# Altium PCB AudioSpectrum.PcbDoc
Units mil, origin at the board's own origin, x right, y up, seen from the top; angles counter-clockwise.
Board outline 2755.24 x 1895 mil, 2 copper layers (Top Layer, Bottom Layer); 57 components, 57 nets, 223 pads, 35 vias.
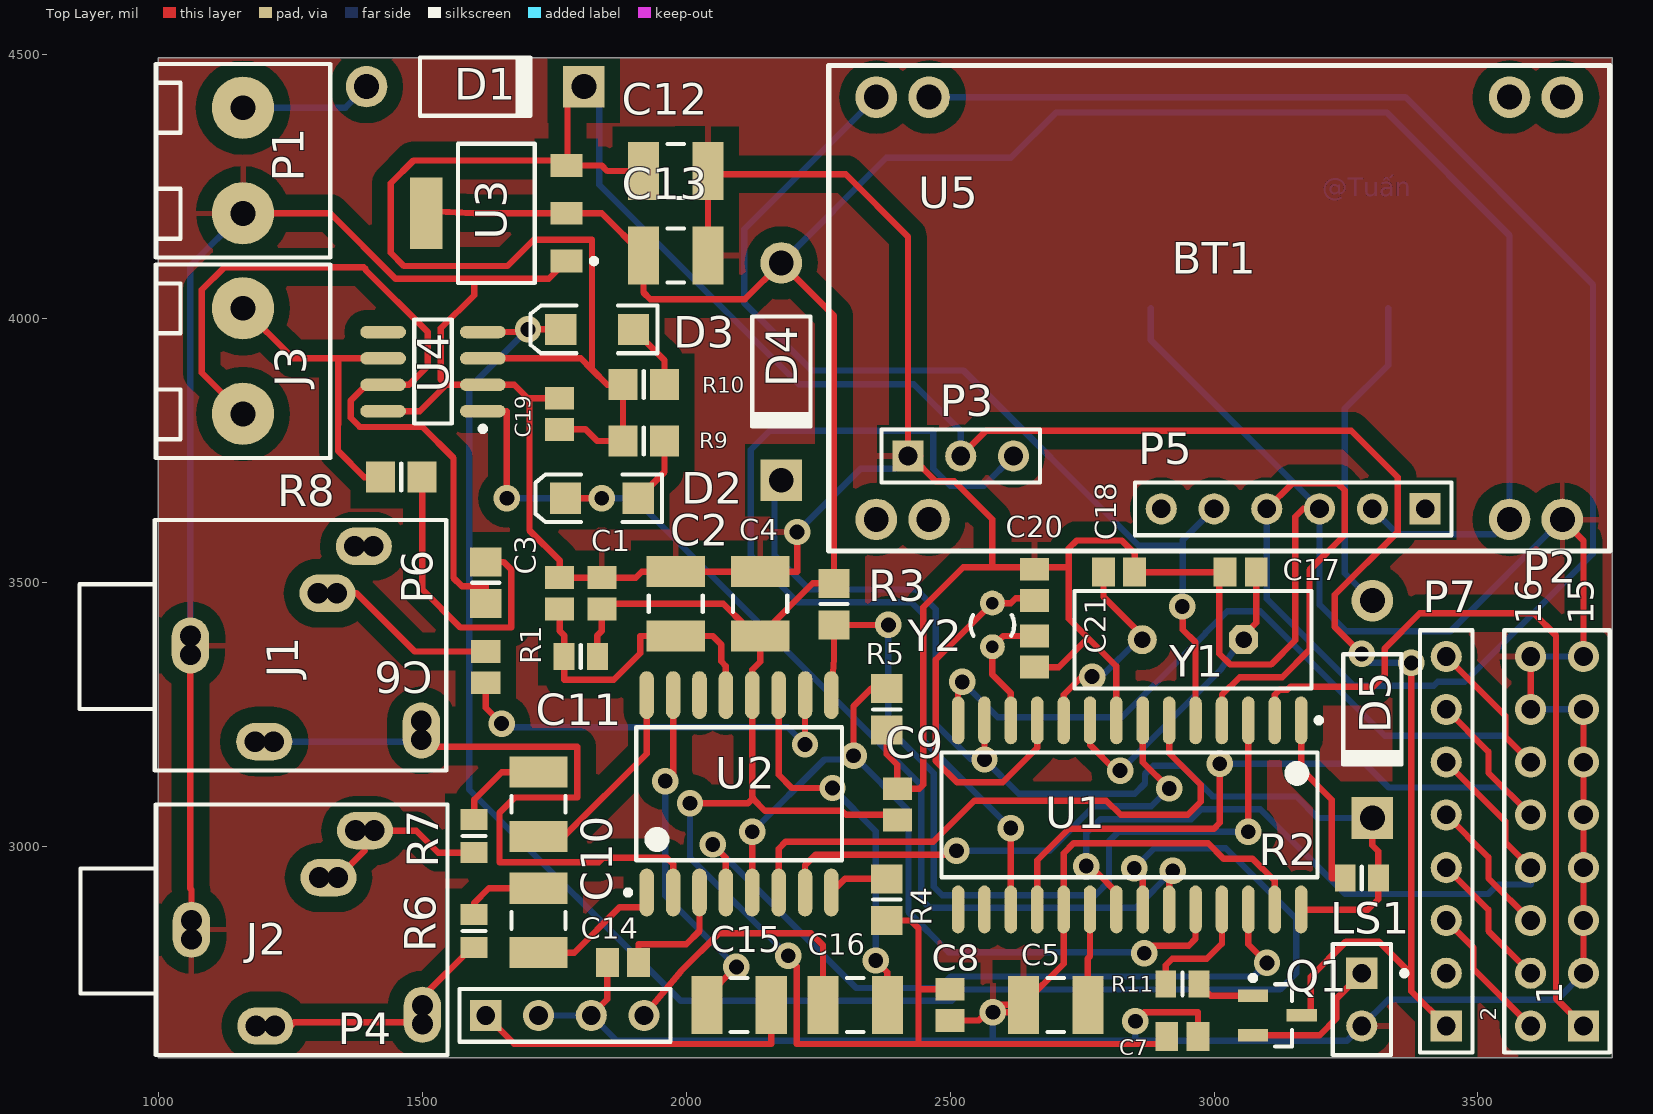
[diagram p0: Top Layer view]
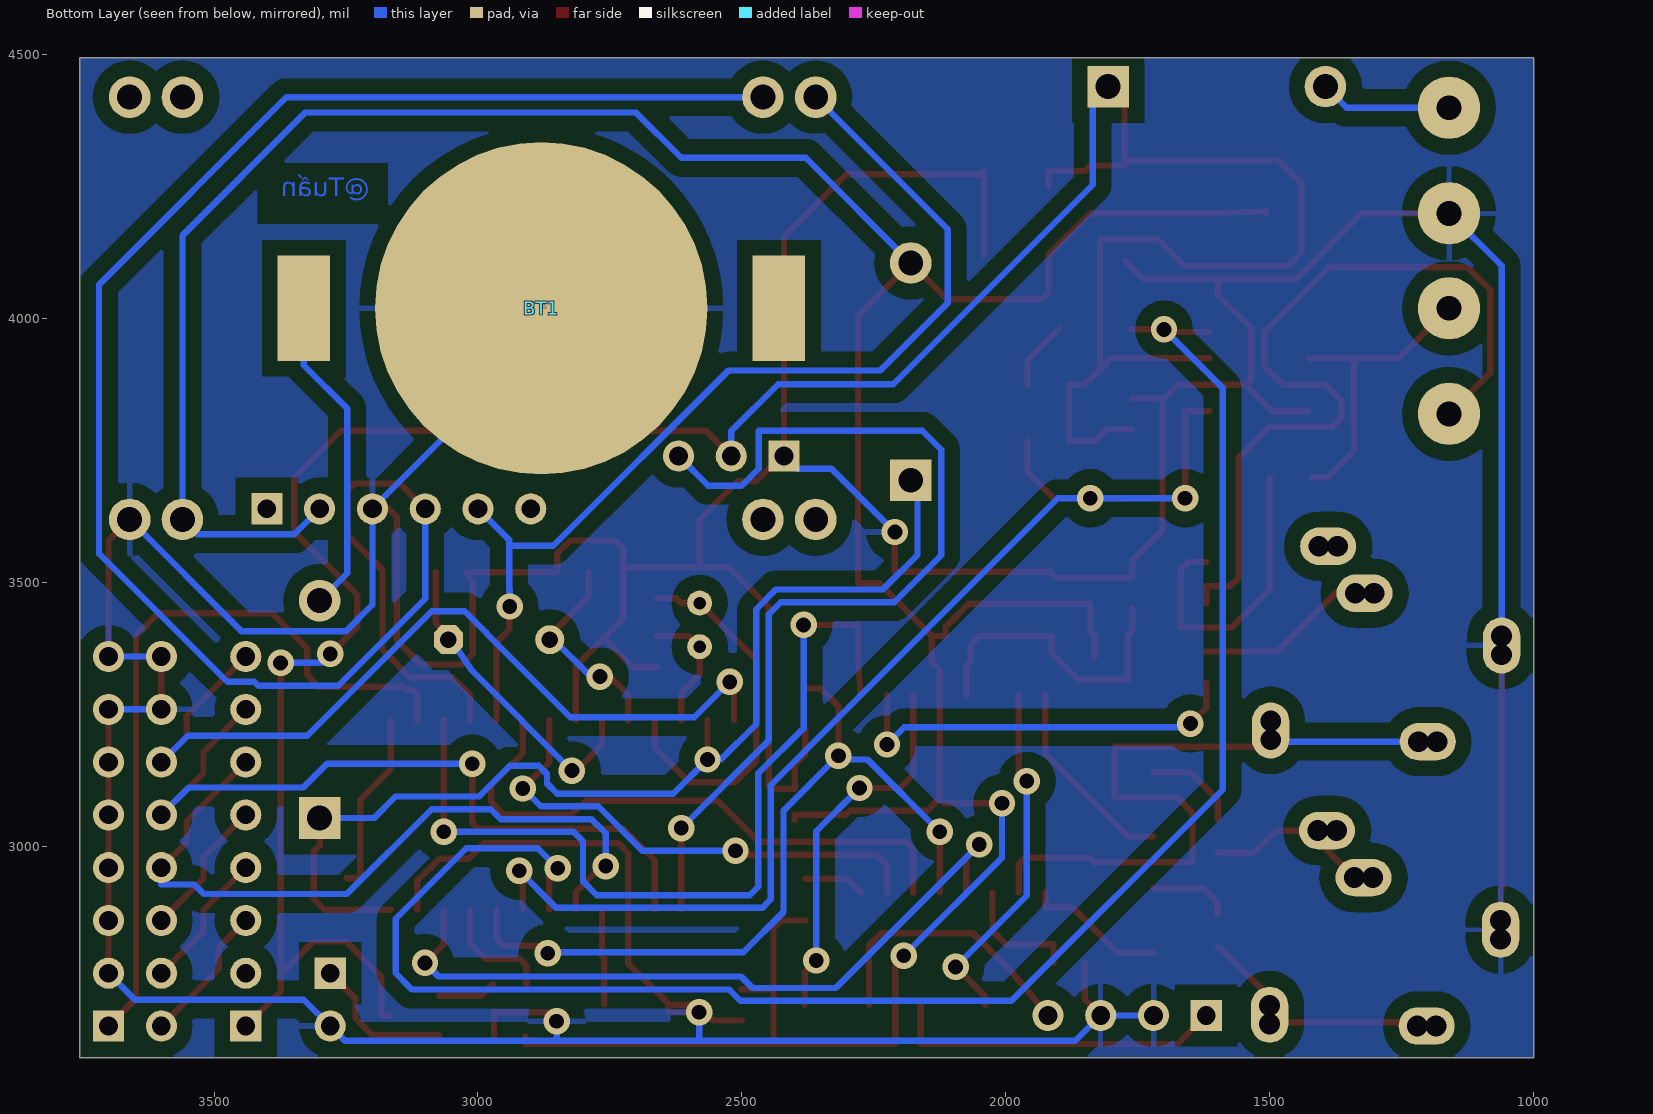
[diagram p1: Bottom Layer view, seen from below]

## Layer stack, top to bottom
Top Layer: signal copper 1.4
Dielectric: core 12.6, FR-4, Dk 4.8
Bottom Layer: signal copper 1.4

## Board outline
999.76,2600 999.76,4494.76 2160,4494.86 3755,4495 3755,2600

## Design rules (kind name [scope] priority, off if disabled: settings)
Clearance Clearance_6 [InNamedPolygon('BotPour')] p1: gap=30
Clearance Clearance_5 [InNamedPolygon('Top Overlay-No Net')] p2: gap=30
Clearance Clearance_4 [OnLayer('Top Overlay')] p3: gap=7
Clearance Clearance_3 [OnLayer('Top Solder') vs (InPadClass('All Pads'))] p4: gap=7
Clearance Clearance_2 [OnLayer('Top Paste')] p5: gap=7
Clearance Clearance_1 [OnLayer('Top Solder')] p6: gap=7
Clearance [All] p7: gap=12
PolygonConnect [All] p1: connectstyle=Relief reliefconductorwidth=10 reliefentries=4 polygonreliefangle="90 Angle"
RoutingVias [All] p1: holewidth=28 width=50 viastyle="Through Hole" minholewidth=28 minwidth=50 maxholewidth=28 maxwidth=50
SilkscreenOverComponentPads [All] p1: minsilkscreentomaskgap=10
SolderMaskExpansion [All] p1: expansion=4
Width [All] p1: maxlimit=50 minlimit=10 preferedwidth=12
27 further rules are at their usual default settings.

## Components (designator, comment, footprint, x,y, rotation, side; value= is the part's Value field where it differs from the comment)
BT1 "Battery" CR2032 2880,4020 r180 bottom
C1 "Cap Pol3" CAPC2012L 1840,3480 r90 top
C2 "Cap Pol3" CAPC3225M 1980,3460 r90 top
C3 "Cap Pol3" CAPC2012L 1760,3480 r90 top
C4 "Cap Pol3" CAPC3225M 2140,3460 r90 top
C5 "Cap Pol3" CAPC3225M 2700,2700 r180 top
C6 "Cap Pol3" CAPC2012L 1620,3340 r270 top
C7 "Cap Pol3" CAPC2012L 2940,2640 r0 top
C8 "Cap Pol3" CAPC2012L 2500,2700 r270 top
C9 "Cap Pol3" CAPC2012L 2400,3080 r90 top
C10 "Cap Pol3" CAPC3225M 1720,2860 r90 top
C11 "Cap Pol3" CAPC3225M 1720,3080 r90 top
C12 "Cap Pol3" CAPC3225M 1980,4280 r0 top
C13 "Cap Pol3" CAPC3225M 1980,4120 r0 top
C14 "Cap Pol3" CAPC2012L 1880,2780 r180 top
C15 "Cap Pol3" CAPC3225M 2100,2700 r0 top
C16 "Cap Pol3" CAPC3225M 2320,2700 r180 top
C17 "Cap Pol3" CAPC2012L 3050.47,3520 r180 top
C18 "Cap Pol3" CAPC2012L 2820,3520 r0 top
C19 "0.1" CAPC2012L 1760,3820 r90 top
C20 "Cap Pol3" CAPC2012L 2660,3496 r90 top
C21 "Cap Pol3" CAPC2012L 2660,3369.53 r270 top
D1 "D Schottky" DIO10.46-5.3x2.8 1600,4440 r0 top
D2 "LED TX" DSO-F2/D6.1 1840,3660 r180 top
D3 "LED RX" DSO-F2/D6.1 1831.1,3980 r180 top
D4 "D Schottky" DIO10.46-5.3x2.8 2180,3900 r270 top
D5 "D Schottky" DIO10.46-5.3x2.8 3300,3260 r270 top
J1 "Phonejack Stereo SW" AUDIO-JACK 835.28,3378.82 r90 top
J2 "Phonejack Stereo SW" AUDIO-JACK 837.28,2840 r90 top
J3 "CAN HEADER 2" "DOMINO SMALL 2 PIN_REV2" 1160,4020 r270 top
LS1 "Speaker" PIN2 3280,2760 r270 top
P1 "5V Power" "DOMINO SMALL 2 PIN_REV2" 1160,4400 r270 top
P2 "Header 8X2" HDR2X8 3700,2660 r90 top
P3 "PL-IRM0101-3" HDR1X3 2420,3740 r0 top
P4 "Header 4" HDR1X4 1620,2680 r0 top
P5 "Header 6" HDR1X6 3400,3640 r180 top
P6 "Header 2H" RESC2012M 1620,3500 r90 top
P7 "Header 8" HDR1X8 3440,2660 r90 top
Q1 "QNPN" SOT95P240-3M 3120,2680 r0 top
R1 "Res Semi" RESC2012L 1800,3360 r180 top
R2 "Res Semi" RESC2012L 3280,2940 r180 top
R3 "Res1" RESC2012M 2280,3459.37 r270 top
R4 "Res1" RESC2012M 2380,2899.37 r90 top
R5 "Res1" RESC2012M 2380,3260 r90 top
R6 "Res Semi" RESC2012L 1598.03,2840 r270 top
R7 "Res Semi" RESC2012L 1598.03,3020 r270 top
R8 "120" RESC2012M 1460,3700 r0 top
R9 "470" RESC2012M 1919.37,3768.64 r0 top
R10 "470" RESC2012M 1919.37,3875.3 r0 top
R11 "Res Semi" RESC2012L 2940,2740 r0 top
U1 "DSPIC33FJ128GP802-I/SO" SOIC-SO28_N 2840,3060 r270 top
U2 "Si3000" SOIC127P1041-16M 2100,3100 r90 top
U3 "REG1117-3.3" ZZ311 1640,4200 r90 top
U4 "MCP2551-I/SN" SOIC-SN8_N 1520,3900 r180 top
U5 "U2E" U2E 3660,4420 r180 top
Y1 "4MHz" BCY-W2/E4.7 2960,3392 r180 top
Y2 "4MHz" BCY-W2/D2.1 2580,3420 r0 top

## Footprints (in the part's own frame and the unit in brackets; to place one, negate y for a bottom-side part, rotate by r counter-clockwise, add the part's x,y. Pads: shape width x height; smd on the part's side, far side on the other; paste and mask are expansions set on the pad)
AUDIO-JACK [mm] "Connector; Stereo Jack, 3.5mm, 5 Position"
  oval 2.7x1.8 all layers, no hole: 1(0.058,-5.715) 2(-4.032,-16.831)
  round 1.2 hole 1: 1A(-0.392,-5.715) 1B(0.508,-5.715) 2A(-4.482,-16.831) 2B(-3.582,-16.831) 3A(4.831,-14.515) 3B(4.831,-13.615) 4A(2.57,-12.762) 4B(2.57,-11.862) 5A(-4.572,-9.721) 5B(-4.572,-8.821)
  oval 1.8x2.7 all layers, no hole: 3(4.831,-14.065) 4(2.57,-12.312) 5(-4.572,-9.271)
  silkscreen extent -5.97,-18.03 6.1,-0.38
BCY-W2/D2.1 [mm] "Crystal, Thru-Hole; 2 Leads; Body 2.1 x 6.2 mm (Dia.xH)"
  round 1.2 hole 0.6: 1(0,1.05) 2(0,-1.05)
  silkscreen extent -1.05,-0.53 1.05,0.48
BCY-W2/E4.7 [mm] "Quartz Crystal, Thru-Hole; 2 Leads; Body 11.35 x 4.65 x 13.46 mm (LxWxH max)"
  oct 1.4x1.4 hole 0.8: 1(-2.44,0)
  round 1.4 hole 0.8: 2(2.44,0)
  silkscreen extent -5.7,-2.35 5.7,2.35
CAPC2012L [mm] "Chip Capacitor, Body 2.0x1.3mm, IPC High Density"
  rect 1.1x1.4 smd: 1(-0.75,0) 2(0.75,0)
  body extent -1.1,-0.72 1.1,0.72, height 1.4
CAPC3225M [mm] "Chip Capacitor, Body 3.2x2.5mm, IPC Low Density"
  rect 1.5x2.8 smd: 1(-1.55,0) 2(1.55,0)
  silkscreen extent -0.4,-1.3 0.4,1.3, body extent -1.7,-1.35 1.7,1.35, height 1.5
CR2032 [mil]
  round 630 smd: 1(0,0)
  rect 100x200 smd: 2(-450,0) 3(450,0)
DIO10.46-5.3x2.8 [mm] "Diode, Axial; Body 5.2 x 2.7 mm (LxDia. max), Lead Dia. 0.86 mm (max)"
  round 2 hole 1.2: 1(-5.23,0)
  rect 2x2 hole 1.2: 2(5.23,0)
  silkscreen extent -2.65,-1.4 2.75,1.4
"DOMINO SMALL 2 PIN_REV2" [mil]
  round 118.1 hole 47.23: 1(0,0) 2(200,0)
  silkscreen extent -83,-165 284,165
DSO-F2/D6.1 [mm] "SMT LED; 2 Flat Leads"
  rect 1.5x1.5 smd: 1(-1.75,0) 2(1.75,0)
  silkscreen extent -2.9,-1.15 3.2,1.15
HDR1X3 [mm] "Connector; Header; 3 Position"
  rect 1.5x1.5 hole 0.9: 1(0,0)
  round 1.5 hole 0.9: 2(2.54,0) 3(5.08,0)
  silkscreen extent -1.27,-1.27 6.35,1.27
HDR1X4 [mm] "Connector; Header; 4 Position"
  rect 1.5x1.5 hole 0.9: 1(0,0)
  round 1.5 hole 0.9: 2(2.54,0) 3(5.08,0) 4(7.62,0)
  silkscreen extent -1.27,-1.27 8.89,1.27
HDR1X6 [mm] "Connector; Header; 6 Position"
  rect 1.5x1.5 hole 0.9: 1(0,0)
  round 1.5 hole 0.9: 2(2.54,0) 3(5.08,0) 4(7.62,0) 5(10.16,0) 6(12.7,0)
  silkscreen extent -1.27,-1.27 13.97,1.27
HDR1X8 [mm] "Connector; Header; 8 Position"
  rect 1.5x1.5 hole 0.9: 1(0,0)
  round 1.5 hole 0.9: 2(2.54,0) 3(5.08,0) 4(7.62,0) 5(10.16,0) 6(12.7,0) 7(15.24,0) 8(17.78,0)
  silkscreen extent -1.27,-1.27 19.05,1.27
HDR2X8 [mm] "Connector; Header; 8x2 Position"
  rect 1.5x1.5 hole 0.9: 1(0,0)
  round 1.5 hole 0.9: 2(0,2.54) 3(2.54,0) 4(2.54,2.54) 5(5.08,0) 6(5.08,2.54) 7(7.62,0) 8(7.62,2.54) 9(10.16,0) 10(10.16,2.54) 11(12.7,0) 12(12.7,2.54) 13(15.24,0) 14(15.24,2.54) 15(17.78,0) 16(17.78,2.54)
  silkscreen extent -1.27,-1.27 19.05,3.81
PIN2 [mm] "Photosensitive Diode; 2 Leads"
  rect 1.5x1.5 hole 0.9: 1(0,0)
  round 1.5 hole 0.9: 2(2.54,0)
  silkscreen extent -1.4,-1.4 3.94,2.18
RESC2012L [mm] "Chip Resistor, Body 2.0x1.3mm, IPC High Density"
  rect 1x1.3 smd: 1(-0.8,0) 2(0.8,0)
  silkscreen extent 0,-0.55 0,0.55, body extent -1.07,-0.7 1.07,0.7, height 2.54
RESC2012M [mm] "Chip Resistor, Body 2.0x1.2mm, IPC Low Density"
  rect 1.4x1.5 smd: 1(-1,0) 2(1,0)
  silkscreen extent 0,-0.65 0,0.65, body extent -1.07,-0.7 1.07,0.7, height 0.7
SOIC127P1041-16M [mm] "CERPACK, 16-Leads, Body 9.9x6.5mm, Pitch 1.27mm, IPC Low Density"
  oval 2.3x0.7 smd: 1(-4.75,4.445) 2(-4.75,3.175) 3(-4.75,1.905) 4(-4.75,0.635) 5(-4.75,-0.635) 6(-4.75,-1.905) 7(-4.75,-3.175) 8(-4.75,-4.445) 9(4.75,-4.445) 10(4.75,-3.175) 11(4.75,-1.905) 12(4.75,-0.635) 13(4.75,0.635) 14(4.75,1.905) 15(4.75,3.175) 16(4.75,4.445)
  silkscreen extent -4.87,-4.95 3.2,5.47, body extent -3.42,-4.95 3.42,4.95, height 2.24
SOIC-SN8_N [mm] "SOIC, 8-Leads, Body 4.9x3.8mm, Pitch 1.27mm, IPC Medium Density"
  oval 2.2x0.6 smd: 1(-2.4,1.905) 2(-2.4,0.635) 3(-2.4,-0.635) 4(-2.4,-1.905) 5(2.4,-1.905) 6(2.4,-0.635) 7(2.4,0.635) 8(2.4,1.905)
  silkscreen extent -2.53,-2.5 0.9,2.88, body extent -2,-2.5 2,2.5, height 1.75
SOIC-SO28_N [mm] "SOIC, 28-Leads, Body 17.9x7.5mm, Pitch 1.27mm, IPC Medium Density"
  oval 2.3x0.6 smd: 1(-4.55,8.255) 2(-4.55,6.985) 3(-4.55,5.715) 4(-4.55,4.445) 5(-4.55,3.175) 6(-4.55,1.905) 7(-4.55,0.635) 8(-4.55,-0.635) 9(-4.55,-1.905) 10(-4.55,-3.175) 11(-4.55,-4.445) 12(-4.55,-5.715) 13(-4.55,-6.985) 14(-4.55,-8.255) 15(4.55,-8.255) 16(4.55,-6.985) 17(4.55,-5.715) 18(4.55,-4.445) 19(4.55,-3.175) 20(4.55,-1.905) 21(4.55,-0.635) 22(4.55,0.635) 23(4.55,1.905) 24(4.55,3.175) 25(4.55,4.445) 26(4.55,5.715) 27(4.55,6.985) 28(4.55,8.255)
  silkscreen extent -4.67,-9.05 3,9.23, body extent -3.8,-9.06 3.8,9.06, height 2.65
SOT95P240-3M [mm] "SOT23, 3-Leads, Body 2.9x1.3mm, Pitch 0.95mm, Lead Span 2.4mm, IPC Low Density"
  rect 1.45x0.6 smd: 1(-1.175,0.95) 2(-1.175,-0.95) 3(1.175,0)
  silkscreen extent -1.3,-1.5 0.7,1.92, body extent -0.7,-1.5 0.7,1.5, height 1.14
U2E [mm]
  round 2 hole 1.2: 1(0,0) 2(2.54,0) 3(30.48,0) 4(33.02,0) 5(33.02,20.32) 6(30.48,20.32) 7(2.54,20.32) 8(0,20.32)
  silkscreen extent -2.29,-1.52 35.31,21.84
ZZ311 [mm] "SOT-223/SC-73; 4 Leads; Body 6.7 x 7.3 mm, inc. leads (LxW max)"
  rect 1.1x1.55 smd: 1(-2.3,-3.375) 2(0,-3.375) 3(2.3,-3.375)
  rect 3.45x1.55 smd: 4(0,3.375)
  silkscreen extent -3.35,-4.83 3.35,1.85

## Part data
BT1: "Multicell Battery"
C1 C2 C3 C4 C5 C6 C7 C8 C9 C10 C11 C12 C13 C14 C15 C16 C17 C18 C20 C21: "Polarized Capacitor (Surface Mount)"
C19: library part C_Dup1
D1 D4 D5: "Schottky Diode"
D2 D3: library part LED
J1 J2: "3-Conductor Jack with 2 break contacts (normals) and 2 auxiliary make contacts"
J3: library part CON2
LS1: "Loudspeaker"
P1: library part "Header 2", "Header, 2-Pin"
P2: "Header, 8-Pin, Dual row"
P3: library part "Header 3", "Header, 3-Pin"
P4: "Header, 4-Pin"
P5: "Header, 6-Pin"
P6: "Header, 2-Pin, Right Angle"
P7: "Header, 8-Pin"
Q1: "NPN Bipolar Transistor"
R1 R2 R6 R7 R11: "Semiconductor Resistor"
R3 R4 R5: "Resistor"
R8 R9 R10: library part R_Dup1
U1: "High-Performance 16-bit Digital Signal Controller, 128 KB Flash, 16 KB RAM, 28-Pin SOIC, Industrial Temperature"
U3: "800mA and 1A Low Dropout Positive Regulator 2.85V, 3.3V, 5V, and Adjustable"
U4: "High-Speed CAN Transceiver, 8-Pin SOIC, Industrial Temperature"
Y1 Y2: library part XTAL, "Crystal Oscillator"

## Via types
v1: diameter 50, hole 28, Top Layer to Bottom Layer, 35 vias

## Nets (pads, with @x,y where several pads share a name; then routed paths per layer and width w, separated by ;. In a path a pad name is that pad's centre, name@x,y a point inside that pad or via, vN(x,y) a via of type N, cw(c..) or ccw(c..) an arc to the next point about the centre after c; other vN are vias at no path point)
5V: C12.1 C19.1 D1.2 P3.2 P7.1 Q1.3 R9.1 R10.1 U3.3 U4.3 | length 5561.1
  Top Layer w12: U4.3 1800.3,3925 1821.39,3903.92 ; C19.1 1809,3790.47 1830.84,3768.64 R9.1 R10.1 1850,3875.3 1821.39,3903.92 ; U3.3 1840,4290.55 1850.55,4280 C12.1 C12.1@1918.98,4251 ; D1.2 1775,4409.09 1775,4300 1772.87,4300 1483,4300 1440,4257 1440,4125 1465,4100 1661,4100 1711,4150 1821.06,4150 1821.39,4149.67 1821.39,3903.92 ; P3.2 2568,3788 3260,3788 3348,3700 3348,3596 3229,3477 3229,3416 v1(3280,3365) ; Q1.3 3183,2680 3183,2753 3250,2820 3312.5,2820 3374,2758.5 ; v1(3374,3348) 3374,2758.5 ; P7.1 3374,2726 3374,2758.5
  Bottom Layer w12: D1.2 1835,4410.91 1835,4254 2212.83,3876.17 2431.32,3876.17 2520,3787.49 P3.2 ; v1(3280,3365) 3297,3348 v1(3374,3348)
A: U1.15
B: U1.16
CANRX: D3.2 U1.22 U4.4 | length 3388
  Top Layer w12: U4.4 1695,3975 v1(1700,3980) D3.2 ; v1(2849,2959) 2865,2943 U1.22
  Bottom Layer w12: v1(1700,3980) 1589,3869 1589,3108 1989,2708 2503,2708 2524,2729 3125,2729 3156,2760 3156,2863 3022,2997 2887,2997 v1(2849,2959)
CANTX: D2.2 U1.23 U4.1 | length 2094.6
  Top Layer w12: U4.1 1660,3825 v1(1660,3660) ; D2.2 v1(1840,3660) ; U1.23 2915,2947 v1(2922,2954)
  Bottom Layer w12: v1(1660,3660) v1(1840,3660) 1901.44,3660 2445,3116.44 2445,2900 2460.95,2884.05 2852.05,2884.05 v1(2922,2954)
CLK: P2.8 P7.6 U1.21 | length 1412.9
  Top Layer w12: v1(2758,2963) 2758,2951 2778,2951 2815,2914 U1.21 ; P7.6 3552,3048 3552,3008 P2.8
  Bottom Layer w12: v1(2758,2963) 2758,3025 2785,3052 2957,3052 2976,3071 3087.5,3071 3248.5,2910 3520,2910 3538,2928 3600,2928 P2.8
GND: BT1.1 C1.2 C2.2 C3.2 C4.2 C5.2 C7.2 C8.2 C9.2 C12.2 C13.2 C14.2 C17.2 C18.2 C19.2 C20.2 C21.2 J1.1 J1.1A J1.1B J2.1 J2.1A J2.1B LS1.2 P1.2 P2.3 P2.5 P2.7 P2.9 P2.11 P2.13 P2.14 P2.15 P2.16 P3.1 P4.2 P4.3 P5.3 R5.1 U1.8 U1.19 U1.27 U3.1 U4.2 U4.8 U5.8 | length 13330.6
  Top Layer w12: J1.1B J1.1 ; J2.1A J2.1 J2.1B 1062.28,2918.43 1060.28,2920.44 J1.1A ; P1.2 1325,4200 1449,4076 1739.42,4076 U3.1 ; U4.8 1495,3825 1545,3875 ; 1598,4074 1598,4045 1535,3982 1535,3885 1545,3875 ; C19.2 1704.53,3849.53 ; P4.3 1850.47,2710.47 C14.2 ; C13.2 C12.2@2041.02,4274 ; C12.2 C12.2@2041.02,4274 ; v1(2210,3596) 2210,3521.02 C4.2 C2.2 1915.5,3521.02 1904,3509.53 C1.2 C3.2 1760,3542 1703,3599 1703,3848 1704.53,3849.53 ; R5.1 2380,3175 2400,3155 C9.2 2441.53,3109.53 2449,3117 2449,3453.53 2525,3529.53 2580,3529.53 ; P3.1@2443.53,3740 P3.1@2424.94,3740 ; C8.2 2554,2670.47 2575.26,2691.74 2583.53,2700 C5.2 ; v1(2581,2686) 2638.98,2686 C5.2 ; C21.2 2706,3340 2760.9,3394.9 ; 2705,3529.53 2725,3529.53 ; U1.8 2815,3342 2725,3432 2725,3529.53 ; v1(2851,2669) 2868,2686 2969.53,2686 C7.2 ; U1.27 3115,2935 3073,2977 3018,2977 2988.86,3006.14 2733.64,3006.14 2715,2987.5 U1.19 2715,2777.98 2638.98,2701.95 C5.2 ; P5.3 3169,3640 3154,3625 3154,3390.9 3108.1,3345 3030.41,3345 3010,3365.41 3010,3503.06 3020.94,3514 C17.2 C18.2 2849.53,3555.47 2825,3580 2740,3580 2725,3565 2725,3529.53 ; P2.14 P2.16 ; U5.8 3700,3580 P2.15 ; P2.3 P2.5 P2.7 P2.9 P2.11 P2.13 ; J1.1A 1069.13,3372.24 J1.1 ; J1.1A J1.1 ; 1545,3875 U4.2 1674,3875 1699.47,3849.53 1704.53,3849.53 ; C12.2@2041.02,4274 2302,4274 2420,4156 P3.1 P3.1@2424.94,3740 ; P3.1@2424.94,3740 2472.47,3692.47 2507.53,3692.47 2580,3620 2580,3529.53 ; 2580,3529.53 2660,3529.53 2725,3529.53
  Bottom Layer w12: J1.1 J1.1B 1060.28,4100.28 P1.2 ; P4.2 P4.3 1868,2632 3252,2632 LS1.2 3330,2710 3650,2710 P2.3 ; v1(2210,3596) 2330,3716 2396,3716 P3.1 ; 2581,2633 v1(2581,2686) v1@2581,2674 ; 2851,2633 v1(2851,2669) v1@2860,2660 ; BT1.1 2880,3960 P5.3 3200,3458 3250,3408 3448,3408 U5.8 ; P2.14 P2.13 ; P2.16 P2.15
IR: P3.3 U1.17 | length 1822.6
  Top Layer w12: U1.17 v1(2615,3035)
  Bottom Layer w12: v1(2615,3035) 2449,3201 2449,3440 2426,3463 2211,3463 2122,3552 2122,3752 2158,3788 2468,3788 2468,3716 2500,3684 2564,3684 P3.3
LINEI: C16.1 U2.11 | length 717.5
  Top Layer w12: U2.11 2175,3136 2200,3111 v1(2277,3111) ; v1(2359,2784) 2381.02,2761.98 C16.1
  Bottom Layer w12: v1(2277,3111) 2359,3029 v1(2359,2784)
LINEO: C15.1 U2.15 | length 672.3
  Top Layer w12: v1(1960,3124) 1975,3139 U2.15 ; C15.1 2038.98,2716 v1(2095,2772.02)
  Bottom Layer w12: v1(1960,3124) 1960,2907.02 v1(2095,2772.02)
MBIAS: J1.2 J1.2A J1.2B J1.5 J1.5A J1.5B U2.2 | length 1446.2
  Top Layer w12: J1.2B J1.2 J1.2A 1497.91,3189 1793.12,3189 1793.12,3093 1675,3093 1646,3064 1646,2970 1834,2970 1843,2979 1962.5,2979 1975,2966.5 U2.2
  Bottom Layer w12: J1.5B J1.5 ; J1.2 J1.2A 1497.91,3198.82 J1.5A ; J1.5 1209.13,3207.68 J1.5A ; J1.5 J1.5A
MCLR: P5.1
MIC: C6.2 U2.10 | length 778.9
  Top Layer w12: C6.2 1620,3263 v1(1650,3233) ; v1(2225,3193.5) U2.10
  Bottom Layer w12: v1(1650,3233) 1650,3226 2192.5,3226 v1(2225,3193.5)
NC: P2.6 P7.5 | length 266.3
  Top Layer w12: P7.5 3520,2980 3520,2940 P2.6
NetBT1_2: BT1.2 D5.1 | length 609.6
  Bottom Layer w12: D5.1 3248,3517.91 3248,3830 3330,3912 BT1.2
NetC5_1: C5.1 U1.20 | length 182.5
  Top Layer w12: C5.1 2761.02,2788 2765,2791.98 U1.20
NetC6_1: C6.1 J1.4 J1.4A J1.4B | length 388.5
  Top Layer w12: J1.4 J1.4A 1375,3480 1485.47,3369.53 C6.1
  Bottom Layer w12: J1.4B J1.4 1328.86,3488.86 J1.4A
NetC10_2: C10.2 R6.1 | length 155.1
  Top Layer w12: R6.1 1598.03,2893.03 1626.02,2921.02 C10.2
NetC11_2: C11.2 R7.1 | length 181.1
  Top Layer w12: R7.1 1598,3089.02 1650,3141.02 C11.2
NetC14_1: C14.1 U2.3 | length 233.8
  Top Layer w12: C14.1 1909.53,2815 2000,2815 2025,2840 U2.3
NetC15_2: C15.2 P4.1 | length 637.4
  Top Layer w12: P4.1 1674,2626 2161.02,2626 C15.2
NetC16_2: C16.2 P4.4 | length 530.8
  Top Layer w12: P4.4 1989.75,2763.75 2062,2836 2236.18,2836 2258.98,2813.2 C16.2
NetC17_1: C17.1 U1.9 Y1.1 | length 601.4
  Top Layer w12: U1.9 2765,3193 2814,3144 v1(2822,3144) ; Y1.1@3056.06,3400 3080,3423.94 C17.1
  Bottom Layer w12: v1(2822,3144) 3013,3335 3052.38,3394.44 3054.22,3397.22 Y1.1@3056.06,3400
NetC18_1: C18.1 U1.10 Y1.2 | length 394.3
  Top Layer w12: U1.10 2715,3287.5 2749.5,3322 v1(2769,3322) ; C18.1 2790.47,3473.47 Y1.2@2863.94,3400
  Bottom Layer w12: v1(2769,3322) 2785.94,3322 2859.94,3396 Y1.2@2863.94,3400
NetD1_1: D1.1 P1.1 | length 250.7
  Bottom Layer w12: P1.1 1354.09,4400 D1.1
NetD2_1: D2.1 R9.2 | length 129.3
  Top Layer w12: D2.1 1958.74,3709.84 R9.2
NetD3_1: D3.1 R10.2 | length 129
  Top Layer w12: D3.1 1958.74,3921.26 R10.2
NetJ1_3: J1.3 J1.3A J1.3B | length 61.9
  Bottom Layer w12: J1.3B J1.3B@1380.16,3560.16 ; J1.3 J1.3B@1380.16,3560.16 ; J1.3A 1405.02,3569.02 1397.02,3561.02 1388.16,3552.16 J1.3B@1380.16,3560.16
NetJ2_2: J2.2 J2.2A J2.2B J2.5 J2.5A J2.5B R6.2 | length 538.1
  Top Layer w12: J2.5 J2.5A 1250,2660 1257,2667 J2.2A@1499.92,2667 ; J2.2A@1499.92,2657 J2.2A J2.2A@1499.92,2667 ; R6.2 1593.5,2808.5 1499.92,2714.92 J2.2B J2.2 J2.2A@1499.92,2667
  Bottom Layer w12: J2.5B J2.5 1211.14,2651.14 J2.5A
NetJ2_3: J2.3 J2.3A J2.3B J2.4 J2.4A J2.4B R7.2 | length 418.9
  Top Layer w12: J2.4 J2.4A 1391.02,2992.48 ; J2.3 J2.3A 1488,3030.2 1529.69,2988.5 R7.2
  Bottom Layer w12: J2.4B J2.4B@1313.15,2932.32 ; J2.4 J2.4B@1313.15,2932.32 ; J2.4A 1337.18,2941.18 1329.59,2933.59 1320.74,2924.74 J2.4B@1313.15,2932.32 ; J2.3B J2.3 1399.88,3021.34 J2.3A
NetJ3_1: J3.1 R8.1 U4.6 | length 581.3
  Top Layer w12: J3.1 1255,3925 1340.2,3925 ; R8.1 1390,3700 1340,3750 1340,3799.8 1340.2,3800 1340.2,3925 ; U4.6 1340.2,3925
NetJ3_2: J3.2 P6.1 U4.7 | length 1588.9
  Top Layer w12: J3.2 1082,3898 1082,4055 1125,4098 1389,4098 1392,4095 1392,4093 1510,3975 1510,3910.5 1474.5,3875 U4.7 1394,3875 1364.2,3845.2 1364.2,3812.5 1381.52,3795.19 1500,3795.19 1559,3736.19 1559,3509 1575,3493 1620,3493 P6.1
NetLS1_1: LS1.1 Q1.2 | length 276.8
  Top Layer w12: Q1.2 3200,2642.6 3232,2674.6 3232,2712 LS1.1
NetP2_2: P2.2 P7.3 | length 266.3
  Top Layer w12: P7.3 3491.21,2808.79 3491.21,2768.79 P2.2
NetP2_4: P2.4 P7.4 | length 266.3
  Top Layer w12: P7.4 3520,2880 3520,2840 P2.4
NetP6_2: P6.2 R8.2 | length 575
  Top Layer w12: R8.2 1499.37,3487.63 1572,3415 1668,3415 1668,3525 1653.63,3539.37 P6.2
NetQ1_1: Q1.1 R11.2 | length 111.6
  Top Layer w12: R11.2 2994.09,2717.4 Q1.1
NetR2_2: R2.2 U1.1 | length 348.7
  Top Layer w12: U1.1 3165,3147 3223,3089 3223,2940 R2.2
NetR11_1: R11.1 U1.25 | length 223.3
  Top Layer w12: R11.1 2908.5,2775 2920.88,2787.37 2986.37,2787.37 3015,2816 U1.25
OE: P2.1 U1.2 | length 1453.8
  Top Layer w12: U1.2 3115,3287.5 3124.5,3297 3138.94,3297 3144.94,3303 3301.4,3303 3323.4,3325 3323.4,3375.4 3390,3442 3606,3442 3648,3400 3648,2712 P2.1
PGC: P5.5 U1.5 U5.4 | length 1951.8
  Top Layer w12: v1(2940,3455) 2941,3454 2941,3411 2965,3387 U1.5
  Bottom Layer w12: U5.4 2110,4170 2110,4030 2238,3902 2525.22,3902 2857.22,3570 2941,3570 ; v1(2940,3455) 2940,3487.22 ; 2941,3486.22 2941,3570 ; P5.5 2941,3581 2941,3570
PGD: P5.4 U1.4 U5.3 | length 3628.5
  Top Layer w12: U1.4 3015,3287.5 3048.5,3321 3129,3321 3181,3373 3181,3524 3248,3591 3248,3675 3235,3688 3148,3688 P5.4
  Bottom Layer w12: U5.3 3363,4420 3718,4065 3718,3555 3475,3312 3424.05,3312 3416.47,3304.42 3265.14,3304.42 3100,3469.56 P5.4
PICVDD: D4.2 D5.2 R2.1 U1.13 U1.28 | length 2056.7
  Top Layer w12: v1(2565,3165) U1.13 ; U1.28 3165,2880 3291.5,2880 3311.5,2900 R2.1 3311.5,2991 3300,3002.5 D5.2
  Bottom Layer w12: D4.2 2167,3681.09 2167,3553 2233,3487 2436,3487 2473,3450 2473,3232 2540,3165 v1(2565,3165) 2629.79,3100.21 2850,3100.21 2869.31,3119.52 2869.31,3137.5 2884.81,3153 2939.84,3153 2997.84,3095 3155.63,3095 3196.54,3054.09 D5.2
R: P2.12 P7.8 U1.14 | length 1649.5
  Top Layer w12: U1.14 2515,3304 v1(2523,3312) ; P7.8 3552,3248 3552,3208 P2.12
  Bottom Layer w12: v1(2523,3312) 2590,3245 2825,3245 2984,3404 2984,3405 3025,3446 3087.5,3446 3323.5,3210 3550,3210 P2.12
SI_FSYNC: U1.6 U2.6 | length 1121.2
  Top Layer w12: U2.6 2175,2996 2188,3009 2468,3009 2546,3087 2796,3087 2823,3060 2950,3060 2975,3085 2975,3117 2915,3177 U1.6
SI_MCLK: U1.7 U2.7 | length 951.6
  Top Layer w12: U2.7 2225,2964.5 2244.8,2984.3 2504.3,2984.3 v1(2512,2992) ; U1.7 2865,3160 v1(2915,3110)
  Bottom Layer w12: v1(2512,2992) 2688.23,2992 2772.45,3076.21 2881.21,3076.21 v1(2915,3110)
SI_RESET: R3.2 U1.3 U2.9 | length 1675.7
  Top Layer w12: U2.9 2280,3356 R3.2 v1(2383,3420) ; v1(3065,3028) U1.3
  Bottom Layer w12: v1(2383,3420) 2383,3224.77 2469,3138.77 2469,2924 2484.95,2908.05 2775,2908.05 2801,2934.05 2801,3010 2819,3028 v1(3065,3028)
SI_SCLK: R4.2 U2.8 | length 115.7
  Top Layer w12: U2.8 2300.75,2938.74 R4.2
SI_SDI: U1.26 U2.4 | length 1400.3
  Top Layer w12: v1(2050,3004) 2075,2979 U2.4 ; U1.26 3065,2815 v1(3100.5,2779.5)
  Bottom Layer w12: v1(2050,3004) 2322,2732 2479.86,2732 2501.67,2753.81 3074.81,2753.81 v1(3100.5,2779.5)
SI_SDO: R5.2 U1.24 U2.5 | length 1509.1
  Top Layer w12: U2.5 v1(2125,3028) ; v1(2317,3172) 2317,3266.37 2350,3299.37 R5.2 ; v1(2868,2798) 2882,2812 2952,2812 2965,2825 U1.24
  Bottom Layer w12: v1(2125,3028) 2262,3165 2306,3165 v1@2308,3163 ; v1(2317,3172) 2421,3068 2421,2876 2497,2800 2866,2800 v1(2868,2798)
SIVA: C2.1 C3.1 R1.2 U2.13 | length 595.5
  Top Layer w12: C3.1 1760,3408.5 1768.5,3400 R1.2 1768.5,3316 1862.5,3316 1912.5,3366 1912.5,3398.98 C2.1 2050,3398.98 2066,3382.98 2066,3351 2075,3342 U2.13
SIVD: C1.1 C4.1 C7.1 C8.1 C9.1 C13.1 D4.1 P5.2 R1.1 R3.1 R4.1 U2.12 U3.2 U3.4 U5.7 | length 6845.3
  Top Layer w12: U3.4 1507.13,4204.44 1507.34,4204.43 1598.94,4200 U3.2 1840,4200 1918.98,4121.02 C13.1 1918.98,4050 1931.98,4037 2111.09,4037 D4.1 2280,4005.91 R3.1 2239.76,3498.74 C4.1 ; R1.1 1831.5,3400 1840,3408.5 C1.1 1840,3460 2070,3460 2114,3416 2114,3398.98 C4.1 ; v1(2007,3082) 2117,3082 2126,3091 ; v1(2193,2793) 2193,2789 2209,2773 2209,2626 2440,2626 ; R4.1 2425,2860 2440,2845 2440,2729.53 ; C9.1 2400,3060 2302.81,3060 2294.81,3068 2149.01,3068 2126,3091 ; C8.1 2440,2729.53 ; C7.1 2910.47,2626 2440,2626 ; 2125,3092.01 U2.12 2125,3335 2140,3350 C4.1 ; 2125,3092.01 2126,3091 ; 2125,3092.01 2127.01,3092.01 2126,3091 ; 2440,2626 2440,2729.53
  Bottom Layer w12: v1(2007,3082) 2007,2979 v1(2193,2793) ; D4.1 2379.09,4305 2615,4305 2701,4391 3327,4391 3560,4158 U5.7 3532,3592 3348,3592 P5.2
SOSCI: C20.1 U1.11 Y2.1 | length 714.8
  Top Layer w12: C20.1@2660,3470.47 2624.13,3470.47 2615,3461.34 Y2.1 2473,3354.34 2473,3162 2513,3122 2599.5,3122 2665,3187.5 U1.11
SOSCO: C21.1 U1.12 Y2.2 | length 242.5
  Top Layer w12: U1.12 2615,3291 2580,3326 Y2.2 2600.39,3399.06 C21.1
SPKRL: C11.1 U2.16 | length 381
  Top Layer w12: C11.1 1767.96,3018.98 1925,3176.01 U2.16
SPKRR: C10.1 U2.1 | length 268.6
  Top Layer w12: C10.1 1787.5,2798.98 1873.52,2885 1925,2885 U2.1
STROBE: P2.10 P7.7 U1.18 | length 1476
  Top Layer w12: U1.18 2665,2974 2725,3034 3000,3034 3011,3045 v1(3011,3157) ; P7.7 3520,3180 3520,3140 P2.10
  Bottom Layer w12: v1(3011,3157) 3286,3157 3331,3112 3548,3112 P2.10
pads on no net: BT1.3 P5.6 P7.2 U2.14 U4.5 U5.1 U5.2 U5.5 U5.6

## Polygon pours and split planes (outlines as drawn)
GND on Top Layer "Top Overlay-No Net" (solid, pour order 1001): 1000,4495 3755,4495 3755,2600 1005,2600 1000,2605
GND on Bottom Layer "BotPour" (solid, pour order 1000): 1000,4495 3755,4495 3755,2600 1000,2600

## Other copper
Bottom Layer:
  text "@Tuấn" at 3205,4220 h60

## Text inside footprints (layer, text, board x,y; h text height)
BT1: Mechanical 2 "CON2_0" at 2880,4020.43 h0.21
P2: Top Overlay "16" at 3620,3420 h50 r90; Top Overlay "15" at 3720,3420 h50 r90; Top Overlay "1" at 3660,2700 h50 r90; Top Overlay "2" at 3535,2670 h30 r90